# Altium PCB plobot_final.PcbDoc (part 2 of 2)
Units mm, origin at the board's own origin, x right, y up, seen from the top; angles counter-clockwise.
Board outline 90.01 x 133 mm, 2 copper layers (Top Layer, Bottom Layer); 119 components, 93 nets, 451 pads, 126 vias.
Unrouted connection lines stored in the file: 91.
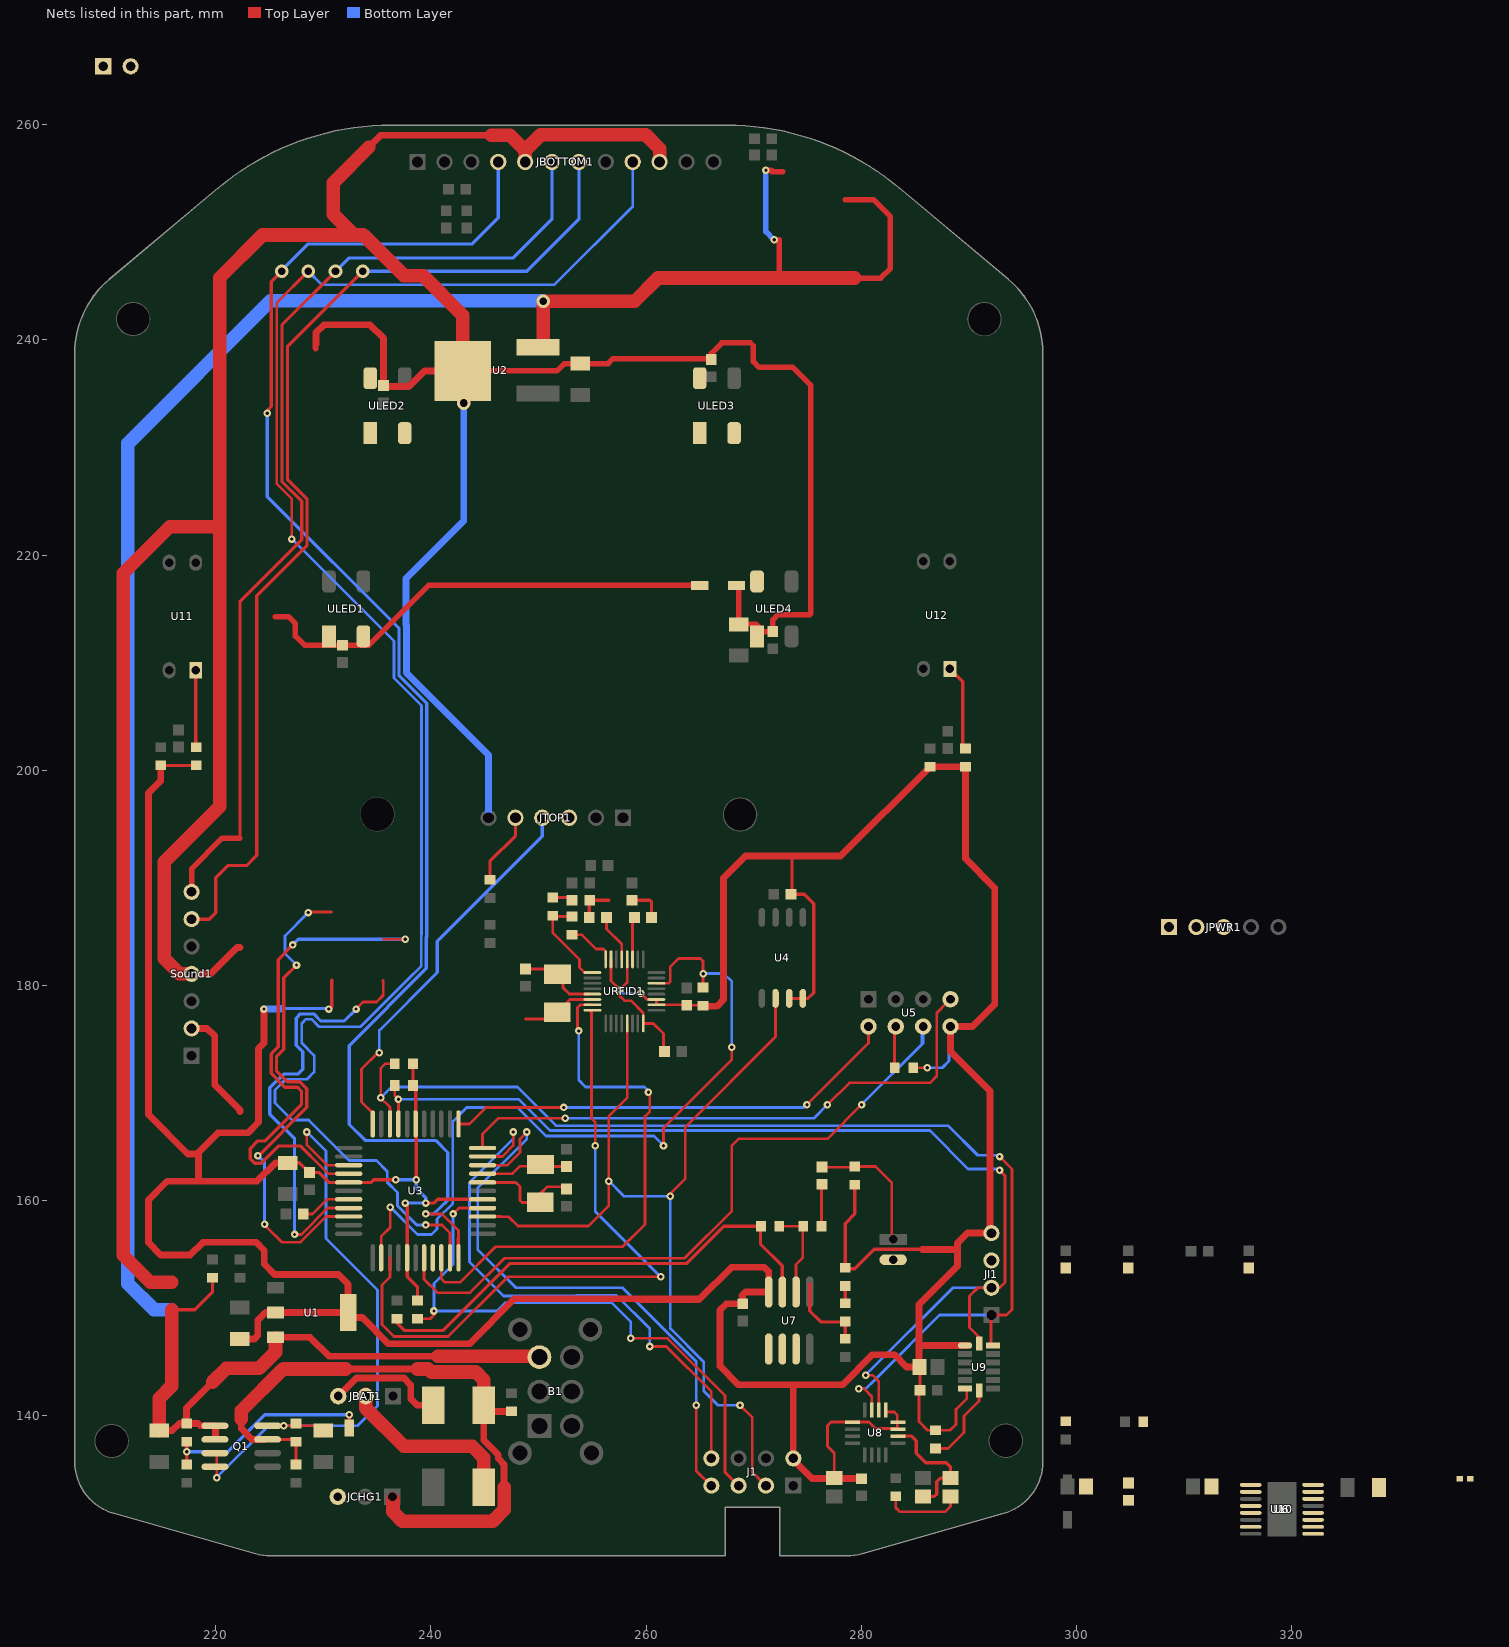
[diagram p2: the nets of this part, all layers, seen from the top]

## Via types
v1: diameter 0.7, hole 0.305, Top Layer to Bottom Layer, 101 vias
v2: diameter 1.27, hole 0.711, Top Layer to Bottom Layer, 16 vias
v3: diameter 0.66, hole 0.305, Top Layer to Bottom Layer, 8 vias
v4: diameter 0.701, hole 0.305, Top Layer to Bottom Layer, 1 vias

## Nets (pads, with @x,y where several pads share a name; then routed paths per layer and width w, separated by ;. In a path a pad name is that pad's centre, name@x,y a point inside that pad or via, vN(x,y) a via of type N, cw(c..) or ccw(c..) an arc to the next point about the centre after c; other vN are vias at no path point) (continued)
NetC2_2: C2.2 Q1.4 Q1.7 Q1.8 R4.1 | length 61.1
  Top Layer w0.254: v1(220.091,134.239) 220.091,135.89 ; Q1.8@220.091,135.382 220.091,135.89 ; Q1.7@220.091,136.525 220.091,135.89 ; Q1.4@224.727,139.065 v1(226.314,139.065) 229.743,139.065 C2.2@229.87,138.938 ; v1@228.473,166.497 v1(228.473,166.37) 228.473,165.147 230.335,163.285 232.358,163.285
  Bottom Layer w0.254: v1(220.091,134.239) 224.917,139.065 v1(226.314,139.065) 233.172,139.065 235.026,140.919 235.026,151.689 230.251,156.464 230.251,162.56 ; v1(228.473,166.37) 230.251,164.592 230.251,162.56 ; 230.251,163.83 230.251,162.56
NetC6_2: C6.2 U3.7 XTAL1.2 | length 10.5
  Top Layer w0.254: U3.7@244.804,161.685 247.89,161.685 248.285,161.29 248.285,160.02 248.477,159.828 XTAL1.2@250.166,159.828 250.166,160.631 250.825,161.29 251.46,161.29 252.387,161.29 C6.2@252.603,161.074
NetC7_2: C7.2 U3.8 XTAL1.1 | length 7.9
  Top Layer w0.254: U3.8@244.804,162.498 247.588,162.498 248.285,163.195 250.034,163.195 XTAL1.1@250.191,163.353 ; XTAL1.1@250.463,163.157 C7.2@252.603,163.157
NetC8_1: C8.1 U3.29 | length 5
  Top Layer w0.254: C8.1@227.965,158.75 C8.1@228.13,158.75 228.981,158.75 230.341,160.11 U3.29@232.358,160.11
NetC12_2: C12.2
NetC14_2: C14.2 U6.11
NetC15_1: C15.1 R18.1 | length 4
  Top Layer w0.305: R18.1@276.313,157.607 276.313,161.505 C15.1@276.352,161.544
NetC15_2: C15.2 MIC1.1 R16.2 | length 12.7
  Top Layer w0.254: C15.2@276.352,163.106 279.362,163.106 R16.2@279.4,163.068 ; R16.2@279.4,163.156 281.344,163.156 282.829,161.671 282.829,156.21 282.956,156.083
NetC18_1: C18.1 D3.1 ULED1.1 | length 44.3
  Top Layer w0.508: 225.525,214.265 226.756,214.265 227.406,213.614 227.406,212.471 228.257,211.62 C18.1@231.775,211.62 234.226,211.62 239.776,217.17 261.493,217.17 ; 262.382,217.17 261.493,217.17 ; D3.1@264.795,217.043 264.668,217.17 261.493,217.17
NetC22_1: C22.1 C23.1 U8.14 | length 11.7
  Top Layer w0.305: U8.14@283.405,138.105 284.678,138.105 285.115,137.668 285.115,136.525 286.004,135.636 287.909,135.636 288.29,135.255 C22.1@288.29,134.2 287.362,134.2 287.02,133.858 287.02,132.715 286.805,132.5 C23.1@285.75,132.5
NetC22_2: C22.2 R22.1 | length 7.3
  Top Layer w0.254: R22.1@283.21,132.5 283.21,131.445 283.591,131.064 287.782,131.064 288.29,131.572 C22.2@288.29,132.334
NetC30_1: C30.1 R25.1 | length 1.9
  Top Layer w0.305: R25.1@251.333,188.175 252.858,188.175 C30.1@253.111,187.922
NetC31_1: C31.1 C32.2 L2.2 | length 3.3
  Top Layer w0.305: C32.2@258.699,187.922 260.35,187.922 260.515,187.757 L2.2@260.515,186.309
NetC34_1: C34.1 C37.1 L3.2 | length 3.4
  Top Layer w0.305: L3.2@254.724,186.309 254.724,187.884 C37.1@254.762,187.922 256.54,187.922
NetC36_1: C36.1 URFID1.22 XRFID1.2 | length 6.1
  Top Layer w0.254: 248.793,176.873 XRFID1.2@251.108,176.873 ; XRFID1.2@251.741,177.506 252.924,178.689 URFID1.22@255.016,178.689
NetC38_1: C38.1 URFID1.21 XRFID1.1 | length 7.4
  Top Layer w0.254: C38.1@248.793,181.521 251.093,181.521 XRFID1.1@251.766,180.848 ; XRFID1.1@251.766,181.031 252.273,180.524 252.273,179.781 252.865,179.189 URFID1.21@254.754,179.189
NetC41_2: C41.2 U10.11
NetC44_2: C44.2 U10.14
NetF1_1: F1.1 JBAT1.3 | length 11.3
  Top Layer w0.635: JBAT1.3@231.394,141.82 233.084,143.51 237.49,143.51 238.125,142.875 238.125,141.605 238.76,140.97 F1.1@240.22,140.97
NetF2_1: F2.1 JBAT1.2 | length 16.9
  Top Layer w1.27: JBAT1.2@233.934,141.989 JBAT1.2@233.934,141.82 233.934,140.716 237.49,137.16 243.84,137.16 244.92,136.08 F2.1@244.92,133.35
NetJTOP1_5: JTOP1.5 R1.2 | length 7.6
  Top Layer w0.254: R1.2@245.491,189.826 245.491,190.717
  Top Layer w0.305: R1.2@245.491,189.826 245.491,191.516 247.854,193.879 JTOP1.5@247.854,195.58
NetL1_1: L1.1 U6.2
NetL2_1: L2.1 URFID1.11 | length 4
  Top Layer w0.254: L2.1@258.699,186.182 258.741,186.14 L2.1@258.741,186.135 ; URFID1.11@258.741,182.414 L2.1@258.741,186.135 ; L2.1@258.915,186.309 L2.1@258.741,186.135
NetL3_1: L3.1 URFID1.13 | length 4.5
  Top Layer w0.254: L3.1@256.324,186.309 256.324,185.255 257.741,183.838 URFID1.13@257.741,182.414
NetR14_2: R14.2 U5.CH_PD | length 3.7
  Top Layer w0.305: U5.CH_PD@283.083,176.022 283.083,172.378 R14.2@283.122,172.339
NetR15_1: R15.1 R18.2 U7.2 | length 8.3
  Top Layer w0.254: R15.1@272.376,157.607 R18.2@274.828,157.607 ; 273.939,152.256 273.939,154.051 274.574,154.686 274.574,157.353 R18.2@274.828,157.607 ; R18.2@274.828,157.734 R18.2@274.828,157.607
NetR15_2: R15.2 R17.1 U7.1 | length 44.4
  Top Layer w0.305: R17.1@236.855,148.59 237.515,147.93 241.148,147.93 247.371,154.153 263.779,154.153 267.233,157.607 R15.2@270.637,157.607 ; R15.2@270.676,157.607 R15.2@270.637,157.607 ; R15.2@270.676,157.734 R15.2@270.764,157.734 ; 272.669,152.256 272.669,153.924 270.637,155.956 R15.2@270.637,157.607
NetR19_2: R19.2 R20.1 U7.3 | length 7.8
  Top Layer w0.305: 275.209,152.256 275.209,149.733 276.225,148.717 278.511,148.717 R19.2@278.511,147.193
NetR20_2: R20.2 R21.1 | length 1.6
  Top Layer w0.305: R20.2@278.511,150.456 R21.1@278.511,152.058
NetR23_2: R23.2 U9.7 | length 8.1
  Top Layer w0.254: R23.2@286.893,136.945 288.075,136.945 289.56,138.43 289.56,139.954 290.957,141.351 290.957,142.494 U9.7@291.084,142.621
NetR24_1: R24.1 R25.2 URFID1.17 | length 9.1
  Top Layer w0.254: R25.2@251.333,186.475 251.333,184.865 253.803,182.394 253.803,181.661 254.275,181.189 URFID1.17@255.016,181.189 URFID1.17@255.009,181.189
  Top Layer w0.305: R25.2@251.333,186.475 251.411,186.397 R24.1@253.111,186.397
NetR24_2: R24.2 URFID1.16 | length 4.5
  Top Layer w0.254: R24.2@253.111,184.697 254.037,184.697 255.346,183.388 256.032,183.388 256.241,183.179 URFID1.16@256.241,182.414
NetR27_1: R27.1 U11.1 | length 7.3
  Top Layer w0.305: R27.1@218.141,202.227 R27.1@218.141,202.19 ; R27.1@218.186,202.145 R27.1@218.141,202.19 ; U11.1@218.186,209.246 U11.1@218.141,209.29 R27.1@218.141,202.19
NetR29_1: R29.1 U12.1 | length 7.9
  Top Layer w0.305: U12.1@288.245,209.417 289.433,208.23 R29.1@289.433,202.018
NetU7_6: U7.6 U7.7
NetULED1_2: ULED1.2 ULED2.4
NetULED2_2: ULED2.2 ULED3.4
NetULED3_2: ULED3.2 ULED4.4
OPT-A: U3.41 U6.9
OPT-B: U3.42 U6.10
OPT-OA: JOPT1.1 U6.7
OPT-OB: JOPT1.2 U6.5
PWR-OFF: D1.2 R5.1 R6.1 U3.35 | length 19.7
  Top Layer w0.305: R6.1@217.297,135.47 v1(217.297,136.652) R5.1@217.297,137.541 ; D1.2@232.41,138.86 v1@232.41,139.954
  Bottom Layer w0.305: v1(217.297,136.652) 221.107,136.652 224.536,140.081 v1(232.41,140.081)
RESET: J1.5 R13.2 U3.4 | length 55.7
  Top Layer w0.254: R13.2@238.76,149.01 239.942,149.01 240.284,149.352 v1(240.284,149.733) v1@240.411,149.733 ; v1(242.062,158.75) 242.609,159.297 242.99,159.297 243.205,159.297 U3.4@244.804,159.297 ; v1(258.572,147.193) 262.001,147.193 267.335,141.859 267.335,134.747 J1.5@268.605,133.477
  Bottom Layer w0.254: v1(242.062,158.75) 242.062,154.051 240.284,152.273 v1(240.284,149.733) 246.126,149.733 246.888,150.495 256.819,150.495 258.572,148.742 v1(258.572,147.193)
RFID-CS: U3.25 URFID1.24 | length 62.7
  Top Layer w0.254: 236.193,154.675 236.193,152.881 235.458,152.146 235.458,148.463 236.553,147.368 241.602,147.368 247.142,152.908 v1(261.366,152.908) ; URFID1.24@254.762,177.673 254.934,177.501 254.934,169.373 254.934,167.62 255.27,167.284 v1(255.27,165.1)
  Bottom Layer w0.254: v1(255.27,165.1) 255.27,159.004 v1(261.366,152.908)
RFID-RST: R26.2 U3.26 URFID1.6 | length 122.8
  Top Layer w0.254: 228.79,164.147 230.44,162.498 U3.26@232.358,162.498 ; 235.381,156.006 235.381,154.675 235.381,156.641 236.22,157.48 v1(236.22,159.385) ; 235.572,184.277 v1(237.617,184.277) ; URFID1.6@260.966,180.189 262.104,180.189 262.255,180.34 262.255,181.737 263.017,182.499 265.049,182.499 265.303,182.245 v1(265.303,181.083) R26.2@265.303,179.92 ; v1(261.62,165.1) 261.62,166.751 267.97,173.101 v1(267.97,174.244)
  Top Layer w0.305: v1(227.167,183.758) 225.806,182.397 225.806,174.277 225.151,173.622 225.151,171.818 226.428,170.541 227.604,170.541 227.965,170.18 227.965,168.91 224.591,165.536 223.925,165.536 223.221,164.832 223.221,163.868 223.634,163.455 224.219,163.455 225.839,165.075 227.863,165.075 228.79,164.147
  Bottom Layer w0.254: v1(236.22,159.385) 238.76,156.845 240.055,156.845 240.563,157.353 240.563,158.267 242.037,159.741 242.037,167.361 243.332,168.656 248.031,168.656 250.698,165.989 260.731,165.989 v1(261.62,165.1) ; v1@265.303,181.102 267.208,181.102 267.97,180.34 v1(267.97,174.244)
  Bottom Layer w0.305: v1(227.167,183.758) 227.686,184.277 229.057,184.277 ; 228.6,184.277 229.057,184.277 ; v1(237.617,184.277) 229.057,184.277
RFID_INT: URFID1.23 | length 51.2
  Top Layer w0.254: 240.969,154.675 240.969,152.731 241.3,152.4 242.697,152.4 245.999,155.702 257.81,155.702 259.893,157.785 259.893,165.989 259.893,167.829 260.35,168.287 260.35,169.926 v1(260.223,170.053) ; v1@253.619,175.768 v1(253.746,175.768) 253.619,175.895 253.619,177.927 253.881,178.189 URFID1.23@255.016,178.189
  Bottom Layer w0.254: v1(253.746,175.768) 253.746,171.196 254.381,170.561 259.842,170.561 260.223,170.18 v1(260.223,170.053)
RST_WIFI: U3.40 U5.RST | length 65.1
  Top Layer w0.254: U3.40@239.368,154.675 239.368,152.681 240.614,151.435 243.648,151.435 246.849,154.635 263.579,154.635 267.97,159.026 267.97,165.1 268.605,165.735 276.86,165.735 v1(280.035,168.91)
  Bottom Layer w0.254: v1(280.035,168.91) 285.623,174.498 ; U5.RST@285.623,176.022 285.623,174.498 ; U5.RST@285.753,176.176 285.753,174.628 285.623,174.498
RXD_FTDI: J1.8 U3.10 | length 53.1
  Top Layer w0.254: U3.10@244.804,164.098 246.648,164.098 247.65,165.1 v1(247.65,166.37) ; v1(260.35,146.431) 261.874,146.431 266.065,142.24 J1.8@266.065,136.039 J1.8@266.065,135.89
  Bottom Layer w0.254: v1(247.65,166.37) 247.65,165.735 243.586,161.671 243.586,154.305 246.761,151.13 253.447,151.13 253.508,151.191 257.241,151.191 260.35,148.082 v1(260.35,146.431)
RXD_WIFI: U3.12 U5.TXD | length 42.9
  Top Layer w0.254: U3.12@242.569,167.121 243.575,167.121 245.11,168.656 v1(252.349,168.656) ; v1(274.955,168.91) 280.673,174.628 U5.TXD@280.673,176.176 ; U5.TXD@280.543,176.022 U5.TXD@280.67,176.022
  Bottom Layer w0.254: v1(252.349,168.656) 269.621,168.656 274.617,168.656 274.871,168.91 v1(274.955,168.91)
SCK: J1.3 U3.3 U4.6 URFID1.29 | length 91.2
  Top Layer w0.254: U3.3@244.804,158.51 246.493,158.51 246.507,158.496 247.222,158.496 248.085,157.632 254.635,157.632 256.54,159.537 v1(256.54,161.798) 256.54,167.844 258.241,169.545 URFID1.29@258.241,176.464 ; v1@262.255,160.655 263.652,162.052 263.652,166.843 272.035,175.226 U4.6@272.035,178.787 ; v1(268.732,140.97) 269.875,139.827 269.875,134.747 J1.3@271.134,133.488
  Bottom Layer w0.254: v1(256.54,161.798) 257.937,160.401 v1(262.255,160.401) 262.255,148.094 265.365,144.983 265.365,142.305 266.7,140.97 v1(268.732,140.97) ; J1.3@271.145,133.858 J1.3@271.145,133.499 J1.3@271.167,133.499
SCL: JI1.3 R11.1 U3.19 U8.2 U9.14 | length 101
  Top Layer w0.254: R11.1@236.64,170.688 236.64,170.649 236.64,169.759 v1(236.981,169.418) U3.19@236.981,167.121 ; v1(280.416,143.764) 281.051,143.764 281.63,143.185 281.63,142.55 U8.2@281.63,140.53 ; U9.14@290.957,146.431 290.957,146.526 290.957,147.32 290.068,148.209 290.068,151.13 290.83,151.892 292.1,151.892 292.862,151.892 293.37,152.4 293.37,162.306 v1(292.862,162.814)
  Bottom Layer w0.254: v1(236.981,169.418) 248.158,169.418 251.073,166.503 286.379,166.503 289.941,162.941 v1@292.862,162.941 ; v1(280.416,143.764) 288.544,151.892 292.1,151.892
SDA: JI1.2 R12.2 U3.20 U8.3 U9.13 | length 105.7
  Top Layer w0.254: U3.20@236.193,167.121 236.193,168.683 v1(235.331,169.545) 235.331,172.263 235.788,172.72 236.64,172.72 ; v1@279.654,142.494 v1(279.781,142.494) 280.289,142.494 280.98,141.803 U8.3@280.98,140.53 ; 291.973,149.479 292.057,149.395 U9.13@292.057,146.526 ; 292.1,149.352 293.497,149.352 294.005,149.86 294.005,162.941 v1(292.862,164.084)
  Bottom Layer w0.254: v1@235.458,169.545 v1(235.331,169.545) 236.347,170.561 248.031,170.561 251.632,166.96 288.081,166.96 290.83,164.211 v1@292.989,164.211 ; v1(279.781,142.494) 280.416,142.494 281.305,143.383 281.813,143.891 287.274,149.352 292.1,149.352
SPK: Sound1.2 | length 10.4
  Top Layer w0.635: Sound1.2@217.754,175.997 219.202,175.997 219.913,175.285 219.913,170.739 222.25,168.402 222.25,168.275
SPK-A: Sound1.6 U3.43 U6.16 | length 97.7
  Top Layer w0.305: Sound1.6@217.754,186.157 219.405,186.157 219.989,186.741 219.989,189.992 221.132,191.135 222.25,191.135 222.86,191.135 223.825,192.1 223.825,216.233 225.957,218.365 228.493,220.901 228.493,225.206 226.67,227.029 226.67,239.37 v2(233.68,246.38)
  Bottom Layer w0.305: v2(233.68,246.38) 248.92,246.38 253.76,251.22 253.76,256.54
SPK-B: Sound1.7 U3.44 U6.15 | length 93.1
  Top Layer w0.305: 222.25,193.675 222.25,215.664 227.985,221.399 227.985,224.995 226.162,226.819 226.162,241.402 v2(231.14,246.38)
  Top Layer w0.508: Sound1.7@217.754,188.697 217.754,190.83 220.599,193.675 222.25,193.675
  Bottom Layer w0.305: v2(231.14,246.38) 232.367,247.607 247.607,247.607 251.26,251.26 251.26,256.54
SPK-OA: C13.2 JBOTTOM1.7 L1.2
SPK-OB: C13.1 JBOTTOM1.6 U6.4
SRV-L: JBOTTOM1.9 R9.2 U3.31 | length 205.4
  Top Layer w0.254: v1(223.926,164.16) 223.901,164.135 223.901,164.084 v1@223.952,164.135 ; v1@224.536,157.734 226.136,156.134 227.889,156.134 230.265,158.51 U3.31@232.358,158.51 ; v1(227.076,221.488) 227.076,225.222 225.679,226.619 225.679,243.459 v2(228.6,246.38) ; v1@228.651,186.817 230.772,186.817 ; v4(239.522,157.734) 241.046,157.734 241.781,156.999 241.781,154.675
  Top Layer w0.305: v1@223.901,164.135 223.952,164.135 228.473,168.656 228.473,170.39 227.814,171.049 226.638,171.049 225.659,172.028 225.659,173.412 226.314,174.067 226.314,180.696 v1(227.508,181.889)
  Bottom Layer w0.254: v1(227.076,221.488) 236.563,212.001 236.563,208.574 239.121,206.016 239.121,184.726 239.096,184.7 239.096,181.771 238.381,181.057 ; v1(227.508,181.889) 226.441,182.956 226.441,184.607 v1(228.6,186.766) ; v2(228.6,246.38) 229.87,245.11 251.46,245.11 258.76,252.41 JBOTTOM1.9@258.76,256.54 ; 238.359,181.057 233.457,176.155 229.607,176.155 228.902,176.86 228.387,176.86 227.996,176.469 227.996,174.641 229.153,173.484 229.153,171.956 228.47,171.272 226.506,171.272 225.507,170.273 225.507,169.074 227.093,167.488 228.639,167.488 232.399,163.728 234.925,163.728 235.941,162.712 235.941,161.696 236.906,160.731 236.906,159.515 238.687,157.734 v4(239.522,157.734)
  Bottom Layer w0.305: v1@223.901,164.135 v1(223.926,164.16) 224.536,163.551 v1(224.536,157.797)
SRV-R: JBOTTOM1.4 R10.2 U3.30 | length 182
  Top Layer w0.254: v1(227.33,156.845) 227.953,156.845 230.406,159.297 U3.30@232.358,159.297 ; v1(233.045,177.8) 233.706,178.461 234.95,178.461 235.572,179.083 235.572,180.327 235.572,180.467 235.52,180.415 ; v1(239.522,158.75) 241.046,158.75 242.569,157.227 242.569,154.675 242.519,154.724 242.519,156.515
  Top Layer w0.305: v1(224.79,233.172) 224.79,233.426 225.171,233.807 225.171,245.415 v2(226.136,246.38)
  Bottom Layer w0.305: v1(224.79,233.172) 224.79,225.425 237.046,213.169 237.046,208.774 239.604,206.215 239.604,184.526 239.578,184.5 239.578,181.571 232.41,174.403 232.41,167.068 233.896,165.583 240.436,165.583 241.554,164.465 241.554,160.02 240.792,159.258 240.284,158.75 v1(239.522,158.75) ; v2@226.136,246.456 228.6,248.92 243.84,248.92 246.26,251.34 JBOTTOM1.4@246.26,256.54 ; v1(227.33,156.845) 227.33,165.735 225.024,168.041 225.024,170.473 226.306,171.755 227.635,171.755 228.076,172.196 228.076,173.84 227.482,174.433 227.482,176.963 227.862,177.343 229.101,177.343 229.756,176.688 231.933,176.688 v1(233.045,177.8)
TRIG: JTOP1.4 U3.22 | length 36
  Top Layer w0.254: U3.22@234.593,167.121 234.593,168.124 233.553,169.164 233.553,172.212 235.077,173.736 v1(235.204,173.736)
  Bottom Layer w0.254: v1@235.125,173.736 v1(235.204,173.736) 235.204,175.796 240.594,181.186
  Bottom Layer w0.305: 240.594,181.186 240.594,184.079 250.354,193.839 JTOP1.4@250.354,195.58
TXD_FTDI: J1.7 U3.9 | length 55.8
  Top Layer w0.254: U3.9@244.804,163.285 247.101,163.285 ; 247.103,163.287 247.101,163.285 ; 247.142,163.322 247.105,163.285 ; v1(248.92,166.37) 248.281,165.731 248.281,164.461 247.105,163.285 ; v1(264.668,140.97) 264.668,134.874 J1.7@266.065,133.477 ; 247.101,163.285 247.105,163.285
  Bottom Layer w0.254: v1(248.92,166.37) 248.92,165.735 244.348,161.163 244.348,155.448 247.904,151.892 257.81,151.892 264.668,145.034 v1(264.668,140.97)
TXD_WIFI: U3.11 U5.RXD | length 53.3
  Top Layer w0.254: U3.11@244.804,164.885 244.804,166.191 246.253,167.64 v1(252.476,167.64) ; v1(276.86,168.91) 278.892,170.942 286.385,170.942 287.02,171.577 287.02,177.419 288.036,178.435 U5.RXD@288.163,178.435
  Bottom Layer w0.254: v1@252.603,167.767 v1(252.476,167.64) 275.59,167.64 v1(276.86,168.91)
V3: C3.1 C5.1 C9.1 C10.2 C19.1 C20.1 C25.1 C26.1 C28.2 C29.2 J1.2 JI1.4 JPWR1.3 R11.2 R12.1 R13.1 R14.1 R16.1 R21.2 R23.1 R26.1 R27.2 R28.2 R29.2 R30.2 U1.2 U3.5 U3.17 U3.27 U3.38 U4.7 U4.8 U5.VCC U8.1 U8.5 U8.15 U8.16 U9.1 U9.6 URFID1.2 URFID1.3 URFID1.12 URFID1.15 URFID1.32 | length 470.3
  Top Layer w0.254: R28.2@215.011,200.318 R28.2@215.138,200.445 ; v1(237.617,159.766) v1@237.794,159.589 ; R11.2@238.34,170.688 R11.2@238.581,170.447 ; U3.17@238.581,167.121 U3.17@238.633,167.069 ; URFID1.15@256.741,182.414 256.741,180.424 v1@257.571,179.593 ; URFID1.12@258.241,182.414 258.241,180.263 v1@257.571,179.593 ; v1(259.519,179.255) 259.53,179.255 260.096,178.689 URFID1.3@260.966,178.689 URFID1.2@260.966,178.189 263.771,178.189 C29.2@263.779,178.181 ; C28.2@261.62,173.863 261.62,175.514 260.67,176.464 URFID1.32@259.741,176.464 259.741,177.424 258.587,178.577 257.993,178.577 257.556,179.014 v1(257.556,179.578) v1@257.571,179.593 ; C29.2@263.779,178.143 265.253,178.143 R26.1@265.303,178.093 ; R26.1@265.253,178.27 R26.1@265.303,178.22 ; C20.1@277.495,134.2 277.495,135.255 277.495,136.525 276.86,137.16 276.86,139.065 277.2,139.405 U8.5@279.205,139.405 280.711,139.405 281.305,138.811 283.464,138.811 283.337,138.938 283.337,140.081 283.083,140.335 U8.1@282.321,140.335 ; R14.1@284.822,172.339 v1(286.131,172.339) ; C25.1@285.369,142.367 285.369,139.446 286.17,138.645 R23.1@286.893,138.645 288.251,138.645 288.798,139.192 288.798,140.589 289.814,141.605 U9.6@289.814,142.494
  Top Layer w0.305: R28.2@214.884,200.445 215.138,200.445 R27.2@218.186,200.445 ; C10.2@226.695,163.502 227.785,163.502 C9.1@228.727,162.56 ; C9.1@228.727,162.609 229.567,162.609 230.491,161.685 U3.27@232.358,161.685 234.456,161.685 234.696,161.925 v1(236.728,161.925) ; v1(230.505,177.8) 230.505,177.673 230.772,177.94 230.772,180.467 ; v1@237.794,159.589 U3.38@237.794,154.675 237.794,152.908 238.76,151.942 238.76,151.765 ; R11.2@238.34,170.688 238.34,172.72 ; U3.17@238.581,167.121 R11.2@238.581,170.447 ; v1(238.633,161.925) U3.17@238.633,167.069 ; R13.1@238.76,150.495 R13.1@238.76,150.71 238.76,151.765 ; 238.76,151.384 238.76,151.765 ; v1(239.522,159.766) 240.284,159.766 240.628,160.11 U3.5@244.804,160.11 ; 268.986,150.368 268.986,150.406 ; U4.7@273.402,178.787 274.476,178.787 U4.8@274.574,178.689 ; J1.2@273.558,136.017 J1.2@273.939,136.017 ; 273.558,192.024 273.558,188.557 C5.1@273.469,188.468 274.701,188.468 275.59,187.579 275.59,179.324 275.053,178.787 U4.8@274.575,178.787 ; R21.2@278.638,153.67 279.4,153.67 281.198,155.468 285.674,155.468 ; R21.2@278.638,153.758 R21.2@278.511,153.758 278.511,157.861 279.4,158.75 279.4,161.29 R16.1@279.654,161.544 ; C26.1@285.408,144.526 285.458,144.476 C25.1@285.458,142.367
  Top Layer w0.635: R28.2@214.884,200.445 214.884,199.009 213.741,197.866 213.741,167.996 217.399,164.338 218.402,164.338 ; R27.2@218.186,200.445 R27.2@218.186,200.533 ; 218.402,161.836 218.402,164.338 ; C3.1@222.25,147.14 223.594,147.14 223.901,147.447 223.901,148.844 224.648,149.591 U1.2@225.555,149.591 226.695,149.591 227.33,149.591 U1.2@232.305,149.591 232.305,152.225 231.394,153.137 225.476,153.137 224.511,154.102 224.511,155.372 223.799,156.083 ; 223.774,156.083 223.799,156.083 ; v1(224.485,177.793) 224.485,174.627 223.97,174.112 223.97,167.277 222.987,166.294 220.221,166.294 218.402,164.474 218.402,164.338 ; C10.2@226.695,163.502 225.554,163.502 223.85,161.798 215.494,161.798 213.741,160.045 213.741,156.083 214.884,154.94 215.9,154.94 217.63,154.94 218.811,156.121 223.761,156.121 223.799,156.083 ; U1.2@232.776,149.12 233.629,149.12 236.064,146.685 243.586,146.685 247.777,150.876 264.998,150.876 ; 259.359,150.8 264.922,150.8 264.998,150.876 ; R26.1@265.303,178.054 266.573,178.054 267.208,178.689 267.208,189.992 269.24,192.024 273.558,192.024 278.091,192.024 R30.2@286.385,200.318 R29.2@289.687,200.318 289.687,191.77 292.405,189.052 292.405,178.232 290.349,176.176 U5.VCC@288.293,176.176 288.293,173.86 291.973,170.18 291.973,168.529 JI1.4@291.973,157.226 ; J1.2@273.685,135.89 275.425,134.15 C19.1@280.035,134.15 ; J1.2@273.685,136.039 273.685,142.875 ; 285.674,155.468 285.694,155.448 288.95,155.448 ; U9.1@289.857,146.526 285.464,146.526 285.369,146.431 ; JI1.4@292.1,156.972 289.865,156.972 288.95,156.058 288.95,155.448 ; 264.998,150.876 267.919,153.797 270.993,153.797 271.399,153.391 271.399,151.494 269.248,151.494 268.91,151.156 268.986,151.08 268.986,150.406 267.475,150.406 266.878,149.809 266.878,144.602 268.605,142.875 273.685,142.875 ; 273.685,142.875 273.812,142.875 278.257,142.875 281.051,145.669 283.083,145.669 284.226,144.526 285.369,144.526 285.369,146.431 ; 285.369,146.431 285.369,150.343 288.95,153.924 288.95,155.448
  Bottom Layer w0.254: v1(257.556,179.578) 257.879,179.255 v1(259.519,179.255) ; v1(286.131,172.339) 287.528,172.339 288.163,172.974 U5.VCC@288.163,176.022
  Bottom Layer w0.305: 226.06,177.844 226.067,177.851 230.454,177.851 v1(230.505,177.8) ; v1(236.728,161.925) v1(238.633,161.925) 238.633,161.163 239.522,160.274 v1(239.522,159.766) v1(237.617,159.766)
  Bottom Layer w0.635: v1(224.485,177.793) 226.009,177.793 226.06,177.844
V5: C4.2 C17.1 C21.1 C24.1 C27.1 D3.2 JBOTTOM1.5 JBOTTOM1.10 JPWR1.2 JTOP1.3 Sound1.4 U2.2 ULED2.1 ULED3.1 ULED4.1 | length 365
  Top Layer w0.305: 269.946,239.471 269.982,239.436 ; 275.316,216.363 275.316,214.543 275.361,214.588
  Top Layer w0.508: 229.311,239.192 229.235,239.268 229.235,239.463 229.335,239.563 229.335,240.247 ; U2.2@242.951,237.109 U2.2@243.205,237.109 ; U2.2@243.586,236.601 244.022,237.037 244.022,237.109 251.714,237.109 252.402,237.797 C4.2@253.873,237.797 256.466,237.797 256.896,238.227 266.001,238.227 C24.1@266.065,238.163 266.065,238.735 267.056,239.725 269.692,239.725 ; JBOTTOM1.5@248.717,256.583 JBOTTOM1.5@248.76,256.54 ; D3.2@268.4,217.17 268.605,216.965 C17.1@268.605,213.54 268.654,213.589 270.231,213.589 270.929,212.89 C27.1@271.78,212.89 271.78,213.97 272.263,214.452 275.225,214.452 275.316,214.543 275.316,235.763 273.64,237.439 270.51,237.439 269.982,237.967 269.982,239.435 ; 269.975,239.471 269.946,239.471 269.94,239.471 269.975,239.436 269.982,239.436
  Top Layer w0.635: Sound1.4@217.754,181.077 219.532,181.077 221.971,183.515 222.25,183.515 ; 229.335,239.563 229.335,240.689 230.048,241.402 234.34,241.402 235.585,240.157 C21.1@235.585,235.75 235.674,235.661 237.973,235.661 239.42,237.109 U2.2@242.951,237.109 ; 234.232,257.905 235.349,259.022 245.618,259.022
  Top Layer w1.27: 215.9,152.4 213.919,152.4 211.404,154.915 211.404,218.313 215.722,222.631 220.37,222.631 ; Sound1.4@217.754,181.077 216.637,181.077 215.214,182.499 215.214,191.465 220.37,196.621 220.37,222.631 ; 234.232,257.905 230.937,254.61 230.937,251.663 232.859,249.741 ; U2.2@242.951,237.109 242.951,242.291 239.268,245.974 237.49,245.974 233.723,249.741 232.859,249.741 ; 245.618,259.022 247.352,259.022 248.717,257.658 ; JBOTTOM1.5@248.76,256.54 248.76,257.614 250.226,259.08 259.944,259.08 261.26,257.764 JBOTTOM1.10@261.26,256.54 ; 220.37,222.631 220.37,245.77 224.341,249.741 232.859,249.741
  Bottom Layer w0.635: v2@243.18,234.19 243.106,234.19 v2(243.053,234.137) 243.053,223.164 237.693,217.805 237.693,213.474 237.719,213.448 237.719,209.053 245.354,201.417 245.354,195.58
VBATT: B1.3 C1.1 C11.2 C16.1 C39.2 JPWR1.1 Q1.5 Q1.6 R5.2 R7.2 U1.3 U2.3 U6.1 U6.12 U7.8 U10.1 U10.12 | length 250
  Top Layer w0.305: 215.9,149.86 218.059,149.86 219.71,151.511 R7.2@219.71,152.82 R7.2@219.71,152.908
  Top Layer w0.508: v1(271.145,255.778) 271.653,255.778 271.78,255.651 ; 271.664,255.64 272.69,255.64 ; 272.362,245.798 272.362,249.301 ; 278.49,253.04 281.122,253.04 282.702,251.46 282.702,246.634 281.813,245.745 279.4,245.745
  Top Layer w0.635: C1.1@214.503,138.557 C1.1@214.757,138.811 ; C1.1@214.757,138.61 215.953,138.61 216.623,139.28 R5.2@217.297,139.28 ; R5.2@217.297,139.192 217.385,139.192 R5.2@217.297,139.28 ; 219.71,143.129 217.297,140.716 R5.2@217.297,139.28 ; Q1.6@219.964,137.858 219.964,139.065 218.567,139.065 218.352,139.28 R5.2@217.297,139.28 ; U1.3@225.555,147.291 228.773,147.291 230.534,145.529 240.665,145.529
  Top Layer w1.27: C1.1@214.757,138.61 C1.1@214.757,138.811 ; C1.1@214.757,138.684 C1.1@214.757,138.811 ; 215.9,145.186 215.9,142.748 214.757,141.605 C1.1@214.757,138.811 ; 215.9,145.542 215.9,149.86 ; 219.71,143.129 220.98,144.399 224.028,144.399 225.552,145.923 225.552,147.193 U1.3@225.555,147.193 ; 240.665,145.529 250.01,145.529 B1.3@250.093,145.446 ; B1.3@250.093,145.415 B1.3@250.19,145.415 ; v2(250.444,243.586) 258.953,243.586 261.112,245.745 279.4,245.745 ; U2.3@250.453,239.309 v2@250.453,243.577
  Bottom Layer w0.508: v1(271.145,255.778) 271.145,250.063 v1(271.907,249.301)
  Bottom Layer w1.27: 215.9,149.86 214.249,149.86 211.836,152.273 211.836,230.378 225.095,243.637 245.796,243.637 v2@250.444,243.637
VRAW: CFG1.1 F1.2 JCHG1.3 Q1.3 R3.2 R4.2 | length 61.1
  Top Layer w0.305: Q1.3@224.727,137.795 227.33,137.795 R4.2@227.457,137.668 ; R3.2@227.457,135.47 R4.2@227.457,137.414
  Top Layer w0.635: 222.377,139.7 222.377,138.811 223.393,137.795 Q1.3@224.536,137.795 ; 222.377,140.335 222.377,140.462 ; 231.771,144.056 232.063,144.348 238.76,144.348 ; F1.2@244.92,140.97 244.92,137.714 246.266,136.369 246.266,136.004 246.808,135.462 246.808,133.35 ; F1.2@245.49,140.4 CFG1.1@247.5,140.4
  Top Layer w1.27: 222.377,139.7 222.377,140.335 ; 222.377,140.462 226.263,144.348 232.063,144.348 ; 236.474,132.246 236.474,131.064 237.359,130.179 245.734,130.179 246.808,131.253 246.808,133.35 ; 238.76,144.348 239.763,144.348 240.055,144.056 244.184,144.056 244.92,143.32 F1.2@244.92,140.97
pads on no net: B1.0 B1.1 B1.6 Sound1.3 Sound1.5 U4.3 U5.GPIO2 U6.8 U6.14 U8.4 U8.6 U8.7 U9.3 U9.9 U9.10 U9.11 U9.12 U10.8 ULED4.2 URFID1.7 URFID1.8 URFID1.9 URFID1.19 URFID1.20 URFID1.25 URFID1.26 URFID1.27 URFID1.28
copper on no net: | length 693.3
  Top Layer w0.254: 235.572,186.817 237.109,186.817 237.871,187.579 237.871,189.738 236.804,190.805 230.756,190.805 228.676,192.884 228.676,200.16 233.824,205.308 244.047,205.308 244.072,205.334 244.85,205.334 247.467,202.717 259.416,202.717 262.184,205.486 279.544,205.486 281.571,207.512 281.571,238.137 286.385,242.951 286.385,249.555 280.95,254.99 278.49,254.99 ; 235.699,182.88 235.572,183.007 237.744,183.007 238.506,183.769 238.506,190.119 237.363,191.262 231.14,191.262 229.235,193.167 229.235,200.072 234.014,204.851 244.236,204.851 244.261,204.876 244.661,204.876 247.277,202.26 259.605,202.26 262.374,205.029 279.734,205.029 282.028,207.323 282.028,237.324 287.401,242.697 v1(287.401,248.285) ; v1(277.495,256.413) 278.003,256.413 278.384,256.032 278.384,255.651
  Top Layer w0.305: 230.772,184.277 229.108,184.277 228.213,183.382 228.213,181.071 227.101,179.959 227.101,176.352 228.036,175.418 233.591,175.418 234.682,176.509 239.254,176.509 240.716,177.971 240.716,196.716 235.476,201.956 235.476,203.726 236.118,204.368 244.487,204.368 247.077,201.778 259.805,201.778 262.574,204.546 279.933,204.546 282.51,207.123 282.51,236.79 v1(285.75,240.03) ; 230.772,188.087 230.772,190.106 228.194,192.684 228.194,200.36 233.624,205.791 243.078,205.791 ; 243.586,205.791 243.078,205.791 ; 271.399,146.956 272.669,146.956 ; 272.69,252.39 274.787,252.39 274.828,252.349 ; 272.69,254.34 274.914,254.34 274.955,254.381 ; 276.19,253.69 278.49,253.69 ; v1(278.13,248.92) 278.765,249.555 278.765,250.815 278.49,251.09 ; 278.49,251.74 279.755,251.74 280.06,251.435 280.06,249.58 v1(279.4,248.92) ; 278.49,252.39 280.248,252.39 281.178,251.46 ; 278.49,254.34 280.711,254.34 280.797,254.254 ; 280.77,254.254 284.58,250.444 284.58,248.82 284.607,248.793 ; v1(281.584,240.233) 281.088,239.737 281.088,238.248 281.088,207.712 279.344,205.969 261.984,205.969 259.216,203.2 247.667,203.2 245.05,205.816 243.103,205.816 243.078,205.791 ; 284.607,248.627 284.607,248.793 ; 284.734,248.666 284.607,248.793
  Top Layer w0.508: 228.725,214.265 228.625,214.364 228.625,216.764 229.335,217.473 229.335,221.947 ; 229.335,234.463 229.335,222.987 229.335,221.947 ; 229.337,221.945 229.335,221.947 ; 232.535,239.563 232.535,237.64 230.886,235.991 230.886,234.95 230.886,233.299 233.629,230.556 263.246,230.556 267.025,234.335 269.982,234.335 ; 273.182,239.435 274.864,239.435 276.409,237.891 276.409,218.282 276.835,217.856 279.552,217.856 280.478,216.93 280.478,207.965 279.092,206.578 276.276,206.578 275.316,207.538 275.316,209.443 ; 280.924,250.317 281.178,250.571 281.178,251.46
  Bottom Layer w0.254: v1(277.495,256.413) 277.495,255.905 279.527,253.873 281.813,253.873 v1(287.401,248.285)
  Bottom Layer w0.305: v1(278.13,248.92) 279.4,247.65 281.94,247.65 284.709,244.881 284.709,242.164 282.778,240.233 v1(281.584,240.233) ; v1(279.4,248.92) 283.21,248.92 285.75,246.38 v1(285.75,240.03)
  other v3: 318.5,130.693 319.7,130.693 318.5,131.893 319.7,131.893

## Polygon pours and split planes (outlines as drawn)
GND on Bottom Layer "ANT_GND" (solid, remove dead copper, pour order 20): 271.78,257.175 271.78,248.285 272.415,247.65 277.495,247.65 278.13,248.285 278.13,252.293 278.13,256.54 277.495,257.175
GND on Bottom Layer "ANT_GND" (solid, pour order 2): 287.655,163.068 287.655,152.4 283.972,148.717 279.146,143.891 275.971,143.891 268.351,143.891 268.224,143.764 267.97,144.018 267.97,153.416 267.97,154.432 269.494,155.956 269.494,161.544 269.494,162.814 270.764,164.084 271.272,164.592 286.258,164.592
GND on Bottom Layer "ANT_GND" (solid, remove dead copper, pour order 10): 262.862,195.13 262.862,196.244 261.564,197.358 252.329,197.358 252.185,197.358 251.752,196.987 251.752,193.149 251.752,192.53 249.011,190.178 245.26,186.959 245.26,185.721 245.26,183.865 243.817,182.627 242.951,181.884 242.951,175.818 243.672,175.199 246.414,172.847 250.742,172.847 266.325,172.847 267.335,173.714 267.046,173.961 267.046,191.787 267.046,192.654 262.862,196.244
GND on Bottom Layer "ANT_GND" (solid, pour order 12): 293.103,144.859 291.369,146.685 284.032,146.685 283.098,146.685 277.495,140.785 277.495,132.074 277.495,131.793 278.295,130.95 278.429,130.81 286.833,130.81 292.436,130.81 293.37,131.793 293.37,144.578

## Keep-outs
Keep-Out Layer:
  lines w0.013: 206.883,135.733 206.883,238.727 ; 206.889,135.733 ccw(c211.889,135.733) 210.515,130.925 223.715,127.154 ccw(c225.089,131.961) 225.089,126.961 267.36,126.961 267.36,131.508 272.415,131.508 272.415,126.961 278.688,126.961 ccw(c278.688,131.961) 280.062,127.154 293.262,130.925 ccw(c291.889,135.733) 296.889,135.733 296.889,238.727 ccw(c287.889,238.727) 293.674,245.621 283.555,254.112 ccw(c267.485,234.961) 267.485,259.961 236.292,259.961 ccw(c236.292,234.961) 220.223,254.112 210.104,245.622 ccw(c215.889,238.727) 206.889,238.727 ; 255.905,205.08 247.777,205.08 247.777,208.534 247.777,208.661 247.848,208.732 241.319,208.732 ; 255.905,205.105 255.905,208.534 255.905,208.712 255.925,208.732 262.319,208.732 ; 241.319,208.732 241.319,215.732 ; 241.319,208.732 241.319,215.732 ; 241.319,208.732 241.319,215.732 ; 241.319,215.732 262.319,215.732 ; 241.319,215.732 262.319,215.732 ; 241.319,215.732 262.319,215.732 ; 262.319,208.732 262.319,215.732 ; 262.319,208.732 262.319,215.732 ; 262.319,208.732 262.319,215.732

## Silkscreen, mask and mechanical layers (free items; w line width, h text height)
Top Overlay:
  text "MLB" at 238.76,257.62 h0.76 r90
  text "MLA" at 241.3,257.62 h0.76 r90
  text "GND" at 243.84,257.62 h0.76 r90
  text "ARMR" at 246.38,252.095 h0.76 r90
  text "5V" at 248.92,252.095 h0.76 r90
  text "SPKB" at 251.46,252.095 h0.76 r90
  text "SPKA" at 254,252.095 h0.76 r90
  text "GND" at 256.54,252.095 h0.76 r90
  text "ARML" at 259.08,252.095 h0.76 r90
  text "+5V" at 261.62,252.095 h0.76 r90
  text "MRB" at 264.16,252.095 h0.76 r90
  text "MRA" at 266.7,252.095 h0.76 r90
  text "MTR-R-I" at 215.9,220.98 h0.76 r90
  text "GND" at 218.44,220.98 h0.76 r90
  text "GND" at 288.925,220.98 h0.76 r90
  text "MTR-L-I" at 286.385,220.862 h0.76 r90
  text "+5V" at 245.745,197.485 h0.76 r90
  text "GND" at 253.365,197.485 h0.76 r90
  text "ANTA" at 255.905,197.485 h0.76 r90
  text "ANTB" at 258.445,197.485 h0.76 r90
  text "ECHO" at 248.234,197.434 h0.76 r90
  text "TRIG" at 250.8,197.256 h0.76 r90
  text "SPKB" at 213.36,188.595 h0.76
  text "SPKA" at 213.36,185.42 h0.76
  text "+5V" at 213.995,180.975 h0.76
  text "SPK" at 213.995,175.895 h0.76
  text "GND" at 213.995,173.355 h0.76
  text "GND" at 212.09,156.845 h0.76
  text "3V" at 294.005,156.845 h0.76
  text "3V" at 212.725,154.94 h0.76
  text "GND" at 294.005,154.305 h0.76
  text "5V" at 212.725,151.765 h0.76
  text "SCL" at 294.005,151.765 h0.76
  text "VBAT" at 211.455,149.225 h0.76
  text "SDA" at 294.005,149.225 h0.76
  text "B7V" at 231.775,142.875 h0.76 r90
  text "B3V" at 234.315,142.875 h0.76 r90
  text "GND" at 236.855,142.875 h0.76 r90
  text "XSP_header" at 267.335,139.7 h0.76
  text "RXD" at 266.7,137.16 h0.76 r90
  text "GND" at 269.24,137.16 h0.76 r90
  text "MOSI" at 271.78,137.16 h0.76 r90
  text "+3V" at 274.32,137.16 h0.76 r90
  text "TXD" at 266.065,129.54 h0.76 r90
  text "RST" at 267.335,129.54 h0.76 r90
  text "SCK" at 273.05,129.54 h0.76 r90
  text "MISO" at 274.32,128.905 h0.76 r90
Bottom Overlay:
  drawing of 1929 lines, arcs and shapes, not listed
  text "MLB" at 238.125,249.555 h0.76 r270
  text "MLA" at 240.665,249.555 h0.76 r270
  text "GND" at 243.205,249.555 h0.76 r270
  text "ARMR" at 245.745,249.555 h0.76 r270
  text "5V" at 248.285,249.555 h0.76 r270
  text "SPKB" at 250.825,249.555 h0.76 r270
  text "SPKA" at 253.365,249.555 h0.76 r270
  text "GND" at 255.905,249.555 h0.76 r270
  text "ARML" at 258.445,249.555 h0.76 r270
  text "5V" at 260.985,249.555 h0.76 r270
  text "MRB" at 263.525,249.555 h0.76 r270
  text "MRA" at 266.065,249.555 h0.76 r270
  text "+5V" at 245.11,189.865 h0.76 r270
  text "TRIG" at 247.65,189.865 h0.76 r270
  text "ECHO" at 250.19,189.865 h0.76 r270
  text "GND" at 252.73,189.865 h0.76 r270
  text "ANTA" at 255.27,189.865 h0.76 r270
  text "ANTB" at 257.81,189.865 h0.76 r270
  text "SPKB" at 215.9,188.595 h0.76
  text "SPKA" at 215.9,185.42 h0.76
  text "+5V" at 215.9,180.975 h0.76
  text "SPK" at 215.9,175.895 h0.76
  text "GND" at 215.9,173.355 h0.76
  text "http://plobot.com" at 285.75,165.1 h1.27
  text "Rodolfo Cossovich" at 284.48,162.56 h0.76
  text "Sean Purser-Haskell" at 284.48,161.29 h0.76
  text "Ivan Tchekashkin" at 284.48,160.02 h0.76
  text "20 JAN 2017" at 283.21,158.75 h0.76
  text "GND" at 213.995,156.845 h0.76
  text "3V" at 290.195,156.845 h0.76
  text "+3V" at 213.995,154.305 h0.76
  text "GND" at 290.195,154.305 h0.76
  text "+5V" at 213.995,151.765 h0.76
  text "SCL" at 290.195,151.765 h0.76
  text "VBAT" at 213.995,149.225 h0.76
  text "SDA" at 290.195,149.225 h0.76
  text "+" at 231.775,139.7 h0.76 r90
  text "-" at 236.855,139.7 h0.76 r90
  text "XSP_header" at 273.685,139.065 h0.76
Bottom Solder:
  region: 277.241,255.905 271.78,255.905 271.78,249.936 277.241,249.936
  region: 276.733,257.175 271.78,257.175 271.78,255.905 276.733,255.905
  region: 277.114,255.016 277.114,249.936 278.13,249.936 278.13,255.016
Mechanical 1:
  drawing of 189 lines, arcs and shapes, not listed
Mechanical 2:
  drawing of 1621 lines, arcs and shapes, not listed

## Text inside footprints (layer, text, board x,y; h text height)
J1: Bottom Overlay "1" at 275.717,132.991 h0.76; Bottom Overlay "7" at 264.541,132.991 h0.76; Bottom Overlay "8" at 264.541,135.531 h0.76; Bottom Overlay "2" at 275.717,135.531 h0.76
MIC1: Bottom Overlay "+" at 284.963,153.264 h0.76